# EAGLE board power circuit o_2 (EAGLE 7.3.0)
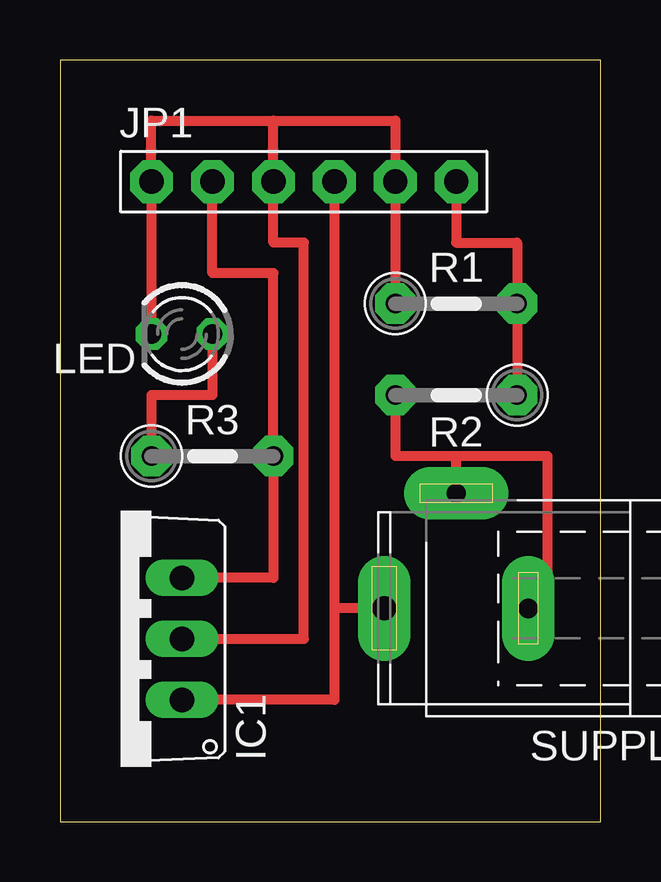
[diagram p0: board, top side]

Size 22.53 x 31.74 mm. Coordinates in mm from the lower left corner, seen from the top.
Outline: 0,0 22.53,0 22.53,31.74 0,31.74 0,0
Copper layers (1*16): Top 0.035mm / dielectric 1.5mm / Bottom 0.035mm
Design rules "default": minimum track width 10mil, minimum drill 24mil, track to track 8mil, track to pad 8mil, pad to pad 8mil, via to via 8mil, smd to smd 8mil, copper to edge 40mil, drill to drill 8mil, minimum pad ring 10mil, minimum via ring 8mil, stop-mask expansion 4mil, vias tented up to drill 0mil, thermal gap 10mil

## Footprints (pad centres in the part's own frame; a part is rotated, then mirrored left to right if it is on the bottom)
TO220V = drill 1.016 long: 1 -2.54,-2.54; 2 0,-2.54; 3 2.54,-2.54
1X06-BIG = drill 1.016 pad 1.778 octagon: 1 -6.35,0; 2 -3.81,0; 3 -1.27,0; 4 1.27,0; 5 3.81,0; 6 6.35,0
LED3MM = drill 0.813 octagon: A -1.27,0; K 1.27,0
0207/5V = drill 0.813 pad 1.676 octagon: 1 -2.54,0; 2 2.54,0
SPC4078 = drill 0.8 pad 2.184 long: 1 -3,0; 2 0,-4.8 | drill 1 pad 2.184 long: 3 3,0

## Placement (x,y rotation side)
IC1  7824TV  [TO220V]  2.54,7.62 90 top
JP1  [1X06-BIG]  10.16,26.67 0 top
LED  TLLR4400  [LED3MM]  5.08,20.32 180 top
R1  1.2K  [0207/5V]  16.51,21.59 0 top
R2  10K  [0207/5V]  16.51,17.78 180 top
R3  1K  [0207/5V]  6.35,15.24 0 top
SUPPLY  [SPC4078]  16.51,8.89 180 top

## Library data of the parts
IC1 = linear
JP1 R1-R3 = adafruit
LED = led; MF: VISHAY SEMICONDUCTOR; OC_FARNELL: 1612437
SUPPLY = con-jack; OC_FARNELL: unknown; OC_NEWARK: unknown

## Nets
24V: IC1.1 JP1.4 SUPPLY.3
A5: JP1.6 R1.2 R2.1
GND: IC1.2 JP1.1 JP1.3 JP1.5 LED.K R1.1
N$1: LED.A R3.1
N$2: IC1.3 JP1.2 R3.2
N$4: R2.2 SUPPLY.1 SUPPLY.2

## Tracks (layer width: path | path; a pad name or v marks a point on that pad's centre or on a via)
24V
  Top 0.406: SUPPLY.3 11.43,8.89 | 11.43,8.89 11.43,5.08 IC1.1 | JP1.4 11.43,8.89
A5
  Top 0.406: JP1.6 16.51,24.13 19.05,24.13 R1.2 R2.1
GND
  Top 0.406: LED.K JP1.1 3.81,29.21 8.89,29.21 | R1.1 JP1.5 13.97,29.21 8.89,29.21 | IC1.2 10.16,7.62 10.16,24.13 8.89,24.13 JP1.3 8.89,29.21
N$1
  Top 0.406: LED.A 6.35,17.78 3.81,17.78 R3.1
N$2
  Top 0.406: IC1.3 8.89,10.16 R3.2 8.89,22.86 6.35,22.86 JP1.2
N$4
  Top 0.406: R2.2 13.97,15.24 16.51,15.24 | SUPPLY.2 16.51,15.24 | SUPPLY.1 20.32,8.89 20.32,15.24 16.51,15.24